# Altium PCB PCB1.PcbDoc
Units mm, origin at the board's own origin, x right, y up, seen from the top; angles counter-clockwise.
Board outline 72.64 x 32.26 mm, 2 copper layers (Top Layer, Bottom Layer); 15 components, 9 nets, 32 pads, 0 vias.
Unrouted connection lines stored in the file: 3.
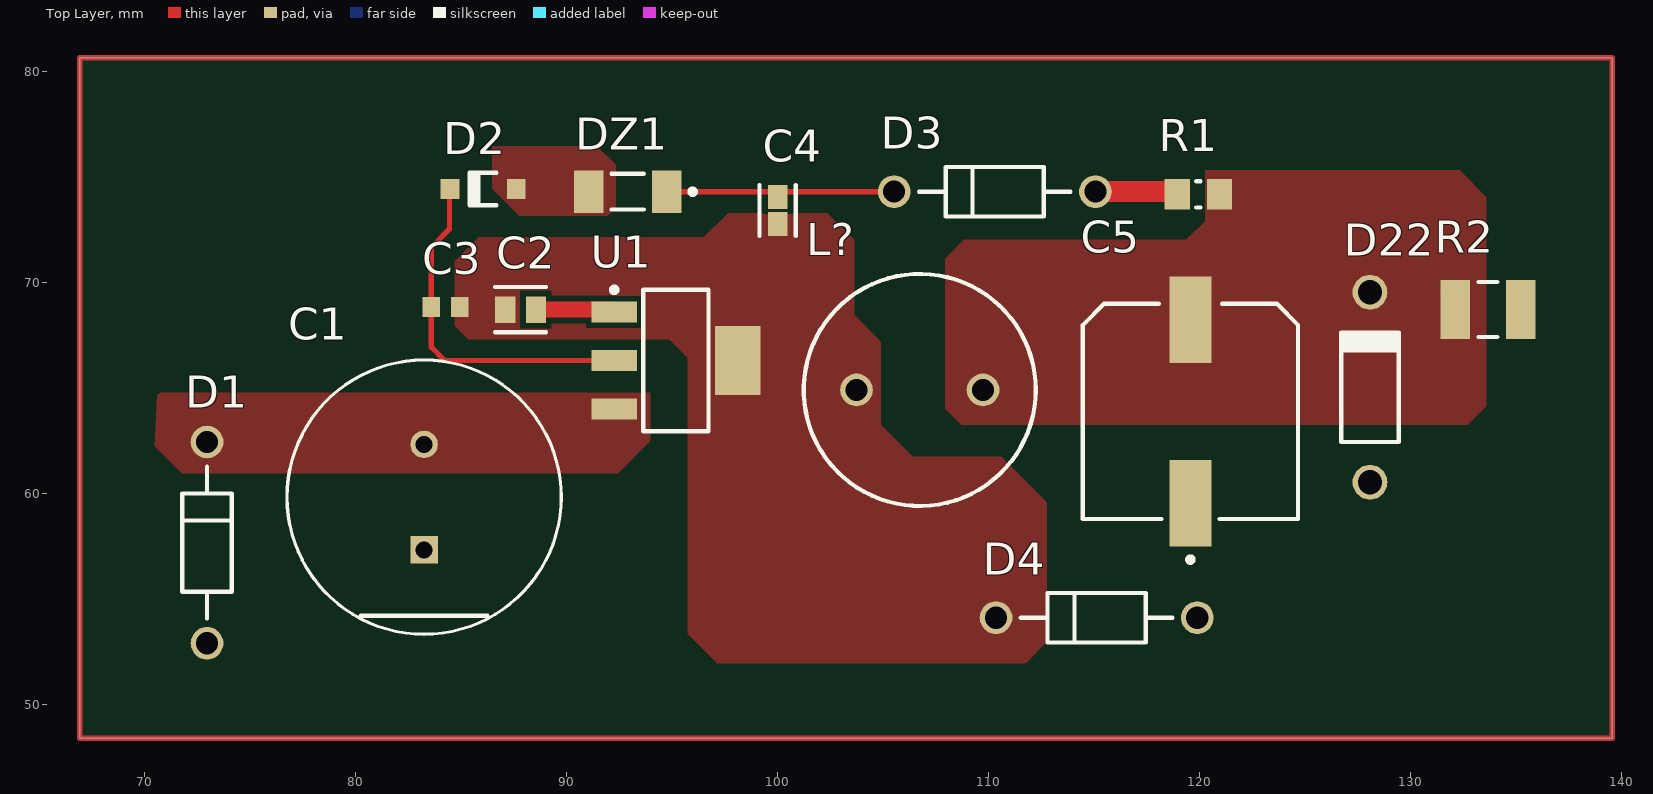
[diagram p0: Top Layer view]
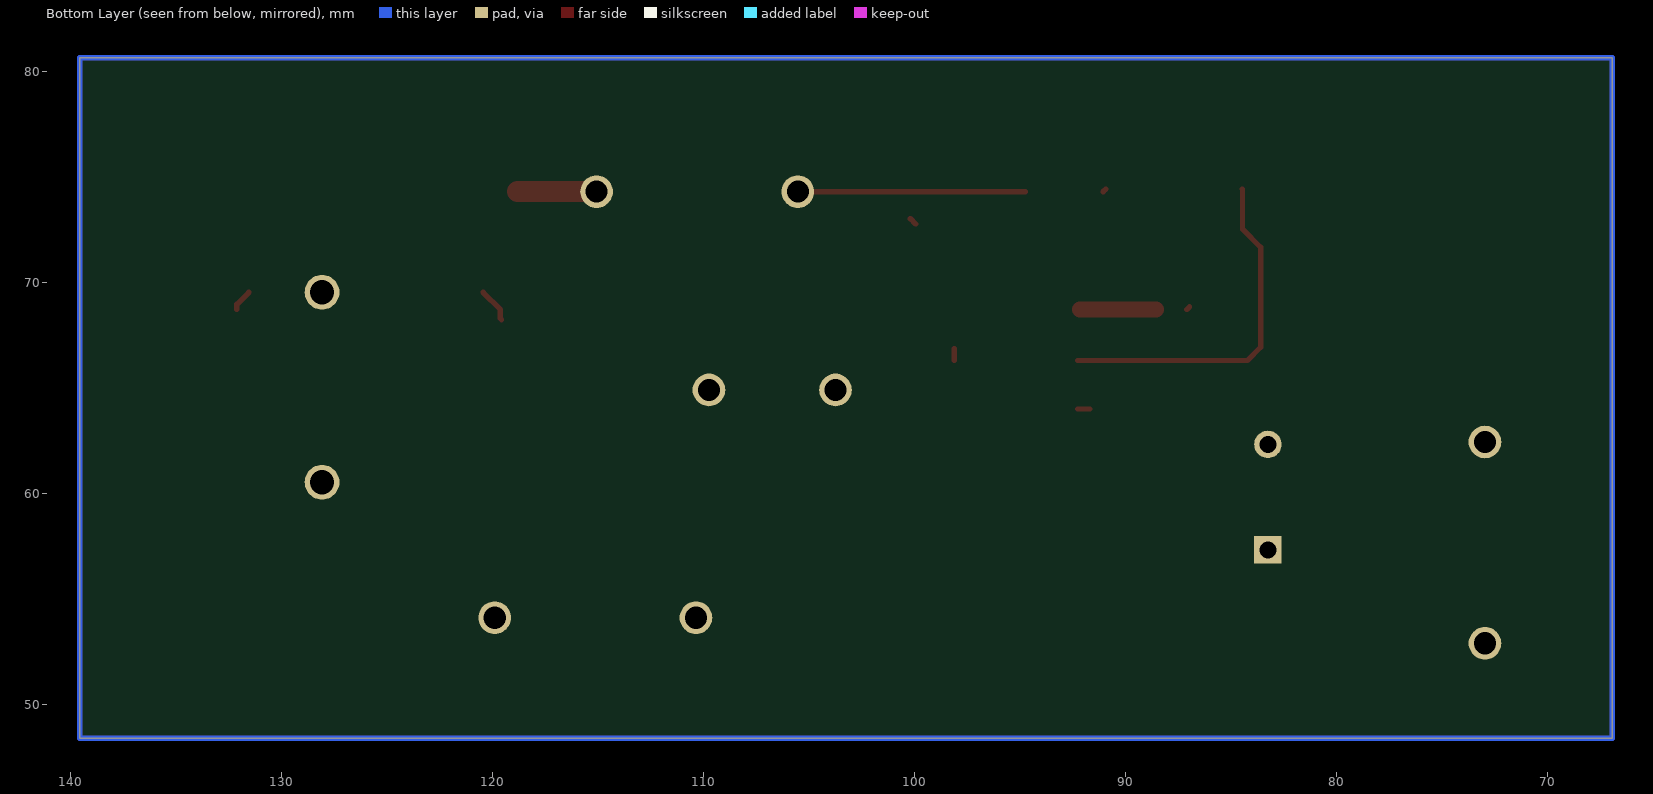
[diagram p1: Bottom Layer view, seen from below]

## Layer stack, top to bottom
Top Solder: solder mask 0.0102, Solder Resist, Dk 3.5
Top Layer: signal copper 0.0356
Dielectric 1: dielectric 0.32, FR-4, Dk 4.8
Bottom Layer: signal copper 0.0356
Bottom Solder: solder mask 0.0102, Solder Resist, Dk 3.5

## Board outline
66.929,48.387 66.929,80.645 139.573,80.645 139.573,48.387

## Design rules (kind name [scope] priority, off if disabled: settings)
Clearance [All] p1: gap=0.254 ignorepadtopadclearanceinfootprint=FALSE except(0: Arc-Hole Track-Hole SMDPad-Hole THPad-Hole Via-Hole Fill-Hole Poly-Hole Region-Hole Text-Hole; 0.1: Arc-SMDPad Track-SMDPad SMDPad-SMDPad)
PolygonConnect [All] p1: connectstyle=Direct reliefconductorwidth=0.254 reliefentries=4 polygonreliefangle="90 Angle" airgapwidth=0.254
RoutingVias [All] p1: holewidth=0.711 width=1.27 viastyle="Through Hole" minholewidth=0.711 minwidth=1.27 maxholewidth=0.711 maxwidth=1.27
SolderMaskExpansion [All] p1: expansion=0.102 istentingtop=FALSE
Width [All] p1: maxlimit=2 minlimit=0.254 preferedwidth=0.254
30 further rules are at their usual default settings.

## Components (designator, comment, footprint, x,y, rotation, side; value= is the part's Value field where it differs from the comment)
C1 "EEUEE2G150" FP-RAD-TH-D_12_5_0_5-L_20-MFG 83.252,59.817 r90 top
C2 "GRM21BR61C106KE15L" FP-GRM21B-0_1-IPC_C 87.824,68.707 r180 top
C3 "GRM1885C1H101JA01D" CAPC1608X90X35NL10T15 84.268,68.834 r180 top
C4 "C1608X7R1E224K080AC" FP-C1608-080-0_1-IPC_B 100.013,73.406 r90 top
C5 "EEE-FC1E331AP" FP-FC-G-MFG 119.578,63.881 r90 top
D1 "1N4007" ONSC-AXIAL_LEAD-2-59-10_P 72.965,57.658 r270 top
D2 "1N4148W-7-F" DIOD-SOD123-2_V 86.046,74.422 r180 top
D3 "MUR160" ONSC-AXIAL_LEAD-2-59-10_P 110.303,74.295 r0 top
D4 "MUR160" ONSC-AXIAL_LEAD-2-59-10_P 115.133,54.102 r0 top
D22 "1N4746A" FAIR-DO-41-2_V 128.087,65.024 r90 top
DZ1 "1N5240BUR-1" FP-DO-213AA-MFG 92.904,74.295 r180 top
L? "RFB1010-182L" COIL-RFB1010-2_V 106.747,64.897 r0 top
R1 "RC0805JR-072KL" RESC2013X60X35ML10T20 119.955,74.168 r0 top
R2 "CRCW121022R0JNEA" RESC3225X60X45ML20T20 133.675,68.707 r0 top
U1 "NCP1055 SOT-223" "NCP1055 SOT-223" 95.19,66.294 r0 top

## Footprints (in the part's own frame and the unit in brackets; to place one, negate y for a bottom-side part, rotate by r counter-clockwise, add the part's x,y. Pads: shape width x height; smd on the part's side, far side on the other; paste and mask are expansions set on the pad)
CAPC1608X90X35NL10T15 [mm] "Chip Capacitor, 2-Leads, Body 1.60x0.80mm, IPC Medium Density"
  rect 0.85x0.95 smd: 1(-0.675,0) 2(0.675,0)
  body extent -0.85,-0.45 0.85,0.45, height 0.9
COIL-RFB1010-2_V [mm] "Radial Leaded, 2-Leads, Dia 11mm, Height 11.5mm, Pin Spacing 6mm"
  round 1.55 hole 1.05: 1(-3,0) 2(3,0)
  Top 3D Body keep-out circle w0.1: c0,0 r5.5
  silkscreen extent -5.5,-5.5 5.5,5.5, body extent -5.5,-5.5 5.5,5.5, height 11.5
DIOD-SOD123-2_V [mm] "SOD123, 2-Leads, Body 2.7x1.55mm, Height 1.45mm"
  rect 0.9x0.95 smd: 1(-1.575,0) 2(1.575,0)
  silkscreen extent -0.64,-0.83 0.64,0.77, body extent -1.35,-0.77 1.35,0.77, height 1.45
FAIR-DO-41-2_V [mm] "2-Leads, Axial leaded, Body 2.72x5.2mm, Pin Spacing 9mm"
  round 1.65 hole 1.15: 1(-4.5,0) 2(4.5,0)
  silkscreen extent -2.6,-1.36 2.6,1.36, body extent -4.93,-1.36 4.93,1.36, height 2.71
FP-C1608-080-0_1-IPC_B [mm]
  rect 1.131x0.912 smd paste+0 mask+0: 1(-0.641,0) 2(0.641,0)
  silkscreen extent -1.21,-0.86 1.21,0.86, body extent -1.46,-0.71 1.46,0.71, height 0.25
FP-DO-213AA-MFG [mm]
  rect 1.4x2.03 smd paste+0 mask+0: 1(-1.84,0) 2(1.84,0)
  silkscreen extent -3.2,-0.85 0.76,0.85, body extent -2.64,-1.11 2.64,1.11, height 0.25
FP-FC-G-MFG [mm]
  rect 4.1x2 smd paste+0 mask+0: 1(-4.35,0) 2(4.35,0)
  silkscreen extent -7.15,-5.1 5.1,5.1, body extent -6.65,-5.35 6.65,5.35, height 0.25
FP-GRM21B-0_1-IPC_C [mm]
  rect 0.958x1.262 smd paste+0 mask+0: 1(-0.727,0) 2(0.727,0)
  silkscreen extent -1.21,-1.07 1.21,1.07, body extent -1.31,-0.77 1.31,0.77, height 0.25
FP-RAD-TH-D_12_5_0_5-L_20-MFG [mm]
  rect 1.3x1.3 hole 0.8 paste-1000 mask+0: 1(-2.5,0)
  round 1.3 hole 0.8 paste-1000 mask+0: 2(2.5,0)
  silkscreen extent -6.5,-6.5 6.5,6.5, body extent -6.6,-6.6 6.6,6.6, height 0.25
"NCP1055 SOT-223" [mm] "SOT223, 4-Leads, Body 6.50x7.00mm (avg), Pitch 2.30mm, IPC Medium Density"
  rect 2.15x1 smd: 1(-2.925,2.3) 2(-2.925,0) 3(-2.925,-2.3)
  rect 2.15x3.25 smd: 4(2.925,0)
  silkscreen extent -3.05,-3.35 1.55,3.47, body extent -3.25,-3.35 3.75,3.35, height 1.8
ONSC-AXIAL_LEAD-2-59-10_P [mm] "AXIAL, 2-Leads, Diameter 2.35mm"
  round 1.55 hole 1.05: 1(-4.77,0) 2(4.77,0)
  silkscreen extent -3.59,-1.17 3.59,1.17
RESC2013X60X35ML10T20 [mm] "Chip Resistor, 2-Leads, Body 2.00x1.25mm, IPC Low Density"
  rect 1.2x1.45 smd: 1(-1,0) 2(1,0)
  silkscreen extent -0.1,-0.63 0.1,0.63, body extent -1.05,-0.67 1.05,0.67, height 0.6
RESC3225X60X45ML20T20 [mm] "Chip Resistor, 2-Leads, Body 3.20x2.50mm, IPC Low Density"
  rect 1.4x2.8 smd: 1(-1.55,0) 2(1.55,0)
  silkscreen extent -0.45,-1.3 0.45,1.3, body extent -1.7,-1.35 1.7,1.35, height 0.6

## Part data
C1: library part CMP-05427-000533-1, "Aluminum Electrolytic Capacitors (Radial Lead Type) 15uF ±20% 400V", Capacitance=15uF, Case/Package=Radial, Dielectric Material=Aluminium, Leakage Current=370uA, Max Operating Temperature=105°C, Min Operating Temperature=-25°C, Package Quantity=200, Ripple Current=590mA, Tolerance=20%, Voltage=400V, Construction=RADIAL, Diameter=12.5mm, Dissipation Factor=0.24%, Height=20mm, Height - Seated (Max)=0.866inch, Lead Diameter=0.6mm, Lead Free="Lead Free", Lead Pitch=5mm, Length=20mm, Life (Hours)=10000Hour, Mount="Through Hole", Number of Pins=2, Packaging=Bulk, Polarity=Polar, Radiation Hardening=No, REACH SVHC="No SVHC", Ripple Current (AC)=590mA, RoHS Compliant=Yes, Series=EE, Termination=Radial, Voltage Rating=400V, Voltage Rating (DC)=400V
C2: library part CMP-2007-03453-2, "Chip Multilayer Ceramic Capacitors for General Purpose, 0805, 10uF, X5R, 15%, 10%, 16V", Capacitance=10uF, Case Code (Imperial)=0805, Case Code (Metric)=2012, Dielectric=X5R, Max Operating Temperature=85°C, Min Operating Temperature=-55°C, Package Quantity=1, Tolerance=10%, Voltage=16V, Case/Package=0805, Depth=1.25mm, Height=1.25mm, Lead Free="Lead Free", Length=2mm, Material=Ceramic, Mount="Surface Mount", Packaging="Tape and Reel", Radiation Hardening=No, REACH SVHC="No SVHC", Termination=SMD/SMT, Thickness=0.053inch, Voltage Rating=16V, Voltage Rating (DC)=16V, Width=1.25mm
C3: library part CMP-2006-02595-1, Manufacturer=Murata, Part Number=GRM1885C1H101JA01D
C4: library part CMP-08246-006302-1, "Multilayer Ceramic Capacitors 220nF ±10% 25V X7R SMD 0603", Capacitance=220nF, Case Code (Imperial)=0603, Case Code (Metric)=1608, Dielectric=X7R, Dielectric Material=Ceramic, Max Operating Temperature=125°C, Min Operating Temperature=-55°C, Package Quantity=1, Tolerance=10%, Voltage Rating=25V, Case/Package=0603, Construction=Flat, Depth=0.8mm, Height=0.8mm, Lead Free="Lead Free", Length=1.6mm, Mount="Surface Mount", Number of Pins=2, Packaging="Tape and Reel", Radiation Hardening=No, REACH SVHC="No SVHC", Resistor Type=Ceramic, RoHS Compliant=Yes, Series=C, Termination=SMD/SMT, Thickness=0.037inch, Voltage Rating (DC)=25V, Weight=7.1E-05oz, Width=0.031inch
C5: library part CMP-05427-000018-1, "CAP ALUM 330UF 20% 25V SMD", Capacitance=330uF, Case/Package=Radial, Dielectric Material=Aluminium, ESR (Equivalent Series Resistance)=150mR, Leakage Current=3uA, Max Operating Temperature=105°C, Min Operating Temperature=-40°C, Package Quantity=1, Ripple Current=670mA, Tolerance=20%, Voltage=25V, Contact Plating=Tin, Diameter=10mm, Height=10.2mm, Height - Seated (Max)=0.402inch, Impedance=150mR, Lead Free="Lead Free", Lead Length=3.5mm, Lead Pitch=4.6mm, Length=10.5mm, Life (Hours)=1000Hour, Mount="Surface Mount", Number of Pins=2, Packaging="Tape and Reel", Radiation Hardening=No, REACH SVHC="No SVHC", Ripple Current (AC)=670mA, Termination=SMD/SMT, Voltage Rating=25V, Voltage Rating (DC)=25V, Width=10.3mm
D1: library part CMP-0902-00142-1, "Standard Recovery Rectifier, 2-Pin Axial_Lead, Pb-Free, Bulk Bag", Manufacturer="On Semiconductor", ComponentLink1Description="Manufacturer URL", ComponentLink1URL=http://www.onsemi.com/, ComponentLink2Description=Datasheet, ComponentLink2URL=http://www.onsemi.com/pub_link/Collateral/1N4001-D.PDF, ComponentLink3Description="Package Specification", ComponentLink3URL=http://www.onsemi.cn/pub_link/Collateral/59-10.PDF, DatasheetVersion="Rev. 13", IFSM Max (A)=30, IO(rec) Max (A)=1, Mounting Technology="Through Hole", PackageDescription="2-Pin, Axial Lead, Diameter 2.35 mm", PackageReference=AXIAL_LEAD-2-59-10, PackageVersion="Rev. U, 02/2005", Packing="Bulk Bag", PartNumber=1N4007, RoHS=TRUE, Type="Standard Recovery", VRRM Max (V)=1000
D2: library part CMP-2000-04932-2, "Fast Switching Diode, 100 V, 0.15 A, -65 to 150 degC, 2-Pin?SOD123, RoHS, Tape and Reel", If - Forward Current=0.15A, Ir - Reverse Current=1uA, Manufacturer=DiodesIncorporated, Max Surge Current=2A, Maximum Operating Temperature=+150C, Minimum Operating Temperature=-65C, Operating Temperature Range=-65Cto+150C, Package / Case=SOD-123, Package Reference=SOD123-2, Peak Reverse Voltage=100V, Vf - Forward Voltage=1.25V, Brand=DiodesIncorporated, Configuration=Single, Datasheet URL=http://www.farnell.com/datasheets/1915529.pdf, Datasheet Version="Rev. 24-2, 10/2013", Factory Pack Quantity=3000, Height=1.25mm, Length=2.85mm, Manufacturer URL=http://www.diodes.com/, Mounting Style=SMD/SMT, Package URL=http://www.diodes.com/datasheets/ds18004.pdf, Packaging=Reel, Product=SwitchingDiodes, Product Category=Diodes-GeneralPurpose,Power,Switching, Recovery Time=4ns, RoHS=True, Series=1N4148, Type=SwitchingDiode, Unit Weight=0.000353oz, Width=1.7mm
D3 D4: library part CMP-0902-00122-1, "SWITCHMODE(TM) Power Rectifier, 2-Pin Axial_Lead, Pb-Free, Bulk Box", Manufacturer="On Semiconductor", ComponentLink1Description="Manufacturer URL", ComponentLink1URL=http://www.onsemi.com/, ComponentLink2Description=Datasheet, ComponentLink2URL=http://www.onsemi.com/pub_link/Collateral/MUR120-D.PDF, ComponentLink3Description="Package Specification", ComponentLink3URL=http://www.onsemi.cn/pub_link/Collateral/59-10.PDF, DatasheetVersion="Rev. 12", IFSM Max (A)=35, Mounting Technology="Through Hole", PackageDescription="2-Pin, Axial Lead, Diameter 2.35 mm", PackageReference=AXIAL_LEAD-2-59-10, PackageVersion="Rev. U, 02/2005", Packing="Bulk Box", PartNumber=MUR160, RoHS=TRUE, Type=Ultrafast, VRRM Max (V)=600
D22: library part CMP-0892-00023-1, "Zener Diode, 18V, 1W, 5%, -65 to 200 degC, 2-Pin DO-41, Body 2.72 x 5.2 mm, RoHS", Manufacturer="Fairchild Semiconductor", Operating and Storage Temperature Range="-65 to 200 degC", Test Current IZ (mA)=14, Tolerance=5%, ComponentLink1Description="Manufacturer URL", ComponentLink1URL=http://www.fairchildsemi.com/, ComponentLink2Description=Datasheet, ComponentLink2URL=http://www.fairchildsemi.com/ds/1N/1N4744A.pdf, ComponentLink3Description="Package Specification", ComponentLink3URL=http://www.fairchildsemi.com/dwg/DO/DO41A.pdf, DatasheetVersion="Rev. H3", IR (uA)=5, Mounting Technology="Through Hole", PackageDescription="2-Pin Axial leaded, Body 2.72 x 5.2 mm, Lead Spread 25.4 mm", PackageReference=DO-41-2, PackageVersion="Rev. 2", PartNumber=1N4746A, PD (W)=1, RoHS=TRUE, VZ (Max.) (V)=18.9, VZ (Min.) (V)=17.1, ZZ (Max) (ohm)=16
DZ1: library part CMP-06360-000046-1, "DIODE ZENER"
L?: library part CMP-0899-00024-1, "Power Inductor, 1.8 mH +/- 10%, 0.45 A, -40 to 125 degC, 2-Pin Radial Leaded, Dia 11 mm, RoHS, Tray", Ambient Temperature Range="-40 to 125 degC", Inductance="1.8 mH", Manufacturer=Coilcraft, Tolerance=10%, ComponentLink1Description="Manufacturer URL", ComponentLink1URL=http://www.coilcraft.com/, ComponentLink2Description=Datasheet, ComponentLink2URL=http://www.coilcraft.com/pdfs/rfb.pdf, DatasheetVersion=Sep-13, DCR="3.5 Ohm Max.", Irms="0.55 A @40 degC", Isat="0.45 A", Mounting Technology="Through Hole", PackageDescription="2-Pin Radial Leaded, Dia 11 mm, Height 11.5 mm, Radial 6 mm", PackageReference=RFB1010-2, Packing=Tray, PartNumber=RFB1010-182L, RoHS=TRUE, SRF="1.3 MHz"
R1: library part CMP-2001-01361-1, Manufacturer=Yageo, Part Number=RC0805JR-072KL
R2: library part CMP-2005-02071-1, Manufacturer="Vishay Dale", Part Number=CRCW121022R0JNEA

## Nets (pads, with @x,y where several pads share a name; then routed paths per layer and width w, separated by ;. In a path a pad name is that pad's centre, name@x,y a point inside that pad or via, vN(x,y) a via of type N, cw(c..) or ccw(c..) an arc to the next point about the centre after c; other vN are vias at no path point)
Control: C3.2 D2.2 U1.2 | length 16.8
  Top Layer w0.254: D2.2 84.455,74.406 84.455,72.517 83.593,71.655 C3.2 83.593,66.929 84.228,66.294 U1.2
DiodeCap: C4.2 D3.1 DZ1.1 | length 10.8
  Top Layer w0.254: DZ1.1 100.197,74.295 100.203,74.301 100.209,74.295 D3.1
Drain: C1.2 D1.1 U1.3 | length 0.7
  Top Layer w0.254: D1.1 D1.1@73.02,62.373 ; C1.2@83.196,62.373 C1.2 ; U1.3@91.69,63.994 U1.3
ICGround: C2.2 C3.1 C4.1 D4.1 L?.1 U1.4 | length 1.3
  Top Layer w0.254: C2.2@86.97,68.834 C2.2 ; U1.4 U1.4@98.115,66.844 ; C4.1@99.949,72.765 C4.1@100.203,73.019 ; L?.1 L?.1@103.759,64.909 ; D4.1@110.236,54.229 D4.1
NetD2_1: D2.1 DZ1.2 | length 0.2
  Top Layer w0.254: DZ1.2@90.937,74.422 DZ1.2
NetD3_2: D3.2 R1.1 | length 3.9
  Top Layer w0.254: R1.1@118.828,74.295 R1.1
  Top Layer w1: D3.2 R1.1@118.828,74.295
OutputNode: C5.2 D22.2 L?.2 R1.2 R2.1 | length 2.7
  Top Layer w0.254: C5.2 119.634,68.287 119.634,68.707 C5.2@120.451,69.524 ; R2.1@131.552,69.524 132.125,68.951 R2.1
SystemGnd: C1.1 C5.1 D4.2 D22.1
Vcc: C2.1 U1.1 | length 3.8
  Top Layer w0.254: U1.1@92.152,68.707 U1.1
  Top Layer w0.762: C2.1 U1.1@92.152,68.707
pads on no net: D1.2 R2.2

## Polygon pours and split planes (outlines as drawn)
ICGround on Top Layer "ICGROUND_L01_P003" (solid, pour order 3): 84.709,67.945 85.344,67.31 94.869,67.31 95.758,66.421 95.758,53.34 97.155,51.943 111.76,51.943 112.776,52.959 112.776,59.563 110.617,61.722 106.426,61.722 104.902,63.246 104.902,67.183 103.632,68.453 103.632,72.009 102.362,73.279 97.663,73.279 96.52,72.136 85.852,72.136 84.709,70.993
OutputNode on Top Layer "OUTPUTNODE_L01_P002" (solid, pour order 2): 107.95,64.008 108.712,63.246 132.715,63.246 133.604,64.135 133.604,74.041 132.334,75.311 120.269,75.311 120.269,72.898 119.38,72.009 108.839,72.009 107.95,71.12
NetD2_1 on Top Layer "NETD2_1_L01_P001" (solid, pour order 1): 86.487,74.422 87.757,73.152 91.948,73.152 92.329,73.533 92.329,75.565 91.44,76.454 86.487,76.454
Drain on Top Layer "DRAIN_L01_P000" (solid, pour order 0): 70.485,62.23 71.755,60.96 92.456,60.96 93.98,62.484 93.98,64.77 70.739,64.77 70.612,64.643

## Other copper
Multi-Layer:
  the board outline again, w0.254

## Silkscreen, mask and mechanical layers (free items; w line width, h text height)
Mechanical 1:
  lines w1.2: 25.4,25.4 25.4,127 ; 25.4,25.4 177.8,25.4 ; 25.4,25.4 25.4,127 ; 25.4,25.4 177.8,25.4 ; 25.4,127 177.8,127 ; 25.4,127 177.8,127 ; 177.8,25.4 177.8,127 ; 177.8,25.4 177.8,127